# Altium PCB F407.PcbDoc (part 3 of 12)
Units mil, origin at the board's own origin, x right, y up, seen from the top; angles counter-clockwise.
Board outline 6062.25 x 4305.79 mil, 2 copper layers (Top Layer, Bottom Layer); 68 components, 138 nets, 423 pads, 108 vias.
Unrouted connection lines stored in the file: 2.
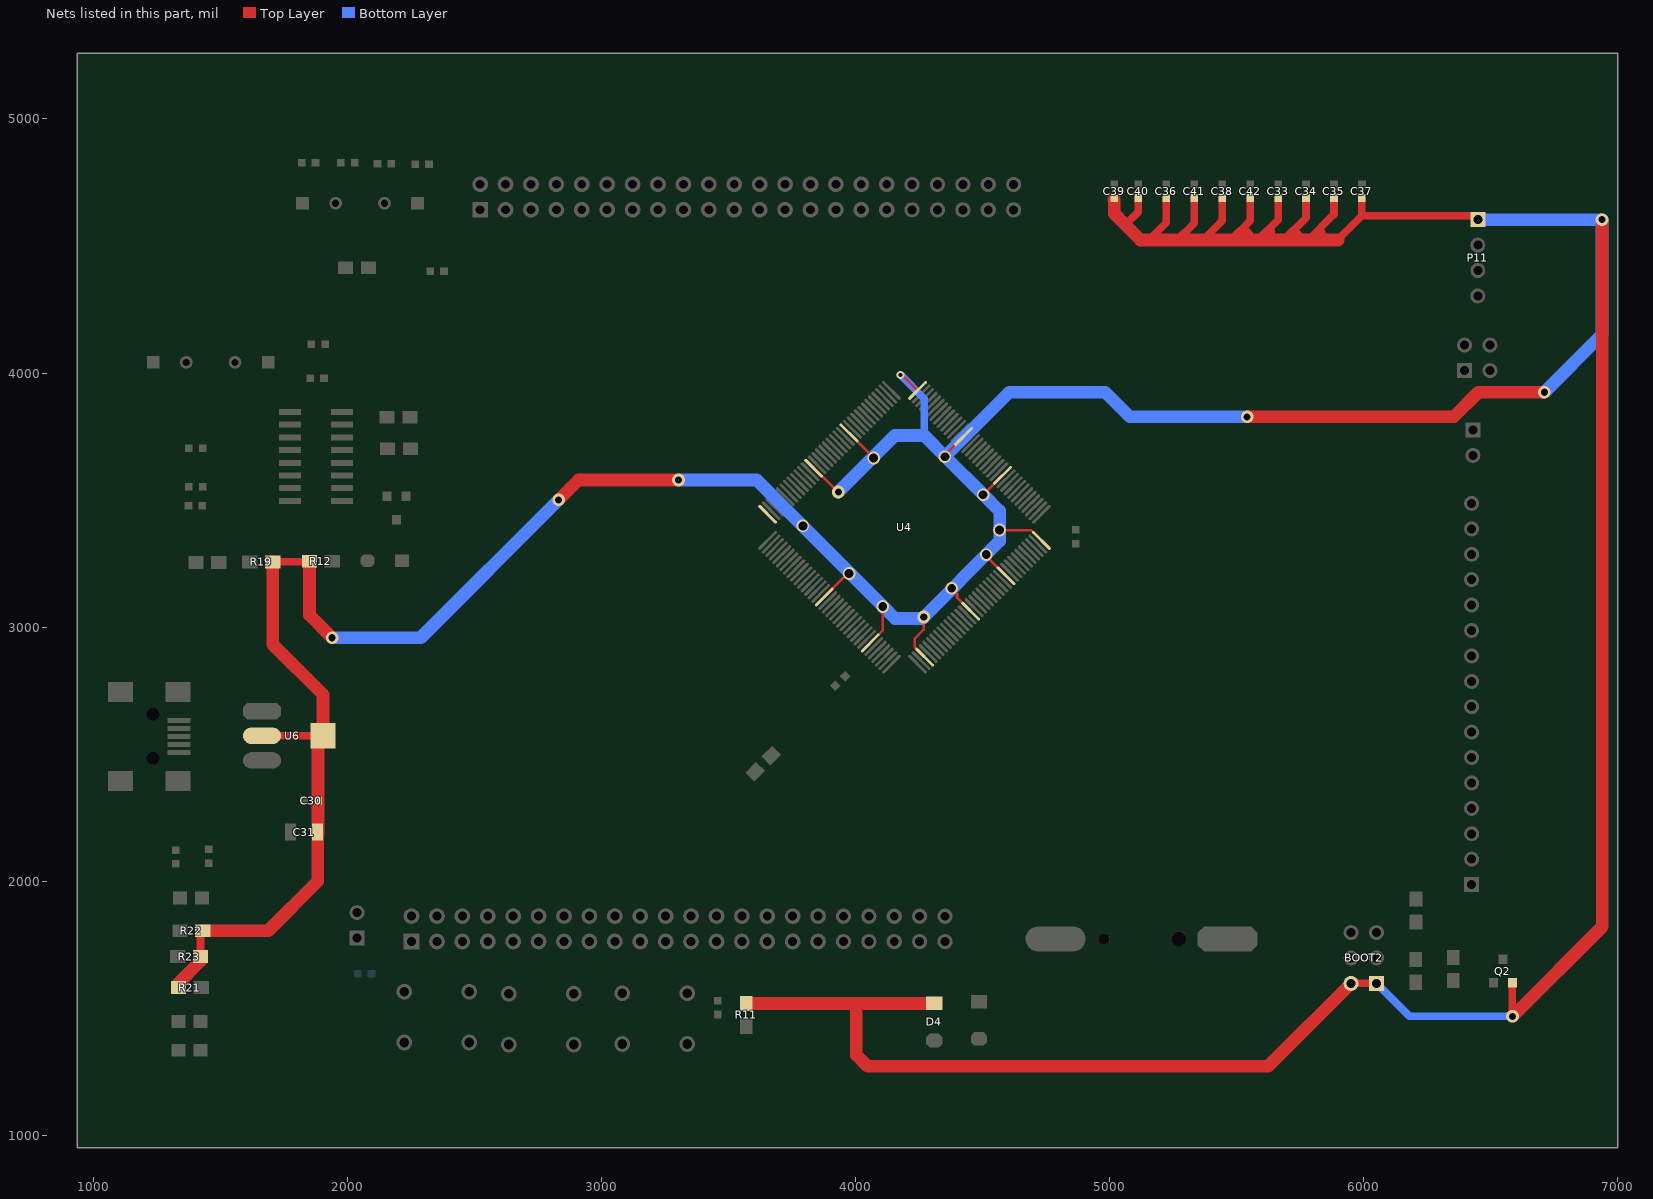
[diagram p3: the nets of this part, all layers, seen from the top]

## Via types
v1: diameter 30, hole 15, Top Layer to Bottom Layer, 48 vias
v2: diameter 50, hole 28, Top Layer to Bottom Layer, 42 vias
v3: diameter 50, hole 35, Top Layer to Bottom Layer, 9 vias
v4: diameter 20, hole 10, Top Layer to Bottom Layer, 8 vias
v5: diameter 50, hole 30, Top Layer to Bottom Layer, 1 vias

## Nets (pads, with @x,y where several pads share a name; then routed paths per layer and width w, separated by ;. In a path a pad name is that pad's centre, name@x,y a point inside that pad or via, vN(x,y) a via of type N, cw(c..) or ccw(c..) an arc to the next point about the centre after c; other vN are vias at no path point) (continued)
VCC3.3: (continued)
  Top Layer w30: R21.2@1335.52,1582.01 R21.2@1335.52,1598.92 ; R23.2@1422.69,1686.09 R23.2@1422.69,1703.85 1422.68,1796.53 R22.2@1431.64,1805.48 ; U6.2@1664.57,2572.63 U6.4@1904.57,2572.63 U6.4@1884.88,2552.94 ; R19.2@1706.82,3256.97 1848.88,3256.97 R12.2@1851.15,3259.25 ; D4.1@4309.56,1519.35 D4.1@4309.74,1519.53 ; 5062.44,4583.22 5113.19,4633.97 C40.2@5113.19,4689.08 ; 5156.2,4524.18 5223.19,4591.17 C36.2@5223.19,4689.08 ; 5266.85,4524.18 5333.19,4590.51 C41.2@5333.19,4689.08 ; 5368.43,4524.18 5443.19,4598.94 C38.2@5443.19,4689.08 ; 5477.43,4524.18 5553.19,4599.94 C42.2@5553.19,4689.08 ; 5520.84,4564.29 cw(c5520.84,4532.9) 5552.23,4532.9 ; 5583.13,4524.18 5663.19,4604.24 C33.2@5663.19,4689.08 ; 5629.91,4536.33 ccw(c5615.97,4551.84) 5631.48,4565.78 ; 5686.35,4524.18 5773.19,4611.01 C34.2@5773.19,4689.08 ; 5724.26,4561.16 cw(c5696.51,4511.98) 5749.38,4531.8 ; 5784.35,4525.41 5883.19,4624.25 C35.2@5883.19,4689.08 ; 5827.29,4564.09 cw(c5816.12,4548.16) 5832.05,4536.99 ; 5898.84,4524.18 5993.19,4618.53 ; BOOT2.2@5950.52,1598.29 BOOT2.1@6050.52,1598.29 ; C37.2@5993.19,4689.08 5993.19,4618.53 ; P11.1@6449.03,4603.71 6434.21,4618.53 5993.19,4618.53 ; Q2.1@6584.85,1600.75 6584.85,1469.67 v2(6586.09,1468.43) ; 5524.47,4551.79 cw(c5502.27,4529.59) 5533.19,4524.18 ; 5524.47,4551.79 cw(c5502.27,4529.59) 5533.19,4524.18 ; 5524.47,4551.79 cw(c5502.27,4529.59) 5533.19,4524.18 ; 5524.47,4551.79 cw(c5502.27,4529.59) 5533.19,4524.18 ; 5524.47,4551.79 cw(c5502.27,4529.59) 5533.19,4524.18 ; 5524.47,4551.79 cw(c5502.27,4529.59) 5533.19,4524.18 ; 5524.47,4551.79 cw(c5502.27,4529.59) 5533.19,4524.18 ; 5524.47,4551.79 cw(c5502.27,4529.59) 5533.19,4524.18 ; 5524.47,4551.79 cw(c5502.27,4529.59) 5533.19,4524.18 ; 5524.47,4551.79 cw(c5502.27,4529.59) 5533.19,4524.18 ; 5524.47,4551.79 cw(c5502.27,4529.59) 5533.19,4524.18 ; 5524.47,4551.79 cw(c5502.27,4529.59) 5533.19,4524.18 ; 5524.47,4551.79 cw(c5502.27,4529.59) 5533.19,4524.18 ; 5524.47,4551.79 cw(c5502.27,4529.59) 5533.19,4524.18 ; 5524.47,4551.79 cw(c5502.27,4529.59) 5533.19,4524.18 ; 5524.47,4551.79 cw(c5502.27,4529.59) 5533.19,4524.18 ; 5524.47,4551.79 cw(c5502.27,4529.59) 5533.19,4524.18 ; 5524.47,4551.79 cw(c5502.27,4529.59) 5533.19,4524.18 ; 5524.47,4551.79 cw(c5502.27,4529.59) 5533.19,4524.18 ; 5524.47,4551.79 cw(c5502.27,4529.59) 5533.19,4524.18 ; 5524.47,4551.79 cw(c5502.27,4529.59) 5533.19,4524.18 ; 5524.47,4551.79 cw(c5502.27,4529.59) 5533.19,4524.18 ; 5524.47,4551.79 cw(c5502.27,4529.59) 5533.19,4524.18 ; 5524.47,4551.79 cw(c5502.27,4529.59) 5533.19,4524.18 ; 5524.47,4551.79 cw(c5502.27,4529.59) 5533.19,4524.18 ; 5524.47,4551.79 cw(c5502.27,4529.59) 5533.19,4524.18 ; 5524.47,4551.79 cw(c5502.27,4529.59) 5533.19,4524.18 ; 5524.47,4551.79 cw(c5502.27,4529.59) 5533.19,4524.18 ; 5524.47,4551.79 cw(c5502.27,4529.59) 5533.19,4524.18 ; 5524.47,4551.79 cw(c5502.27,4529.59) 5533.19,4524.18 ; 5524.47,4551.79 cw(c5502.27,4529.59) 5533.19,4524.18 ; 5524.47,4551.79 cw(c5502.27,4529.59) 5533.19,4524.18 ; 5524.47,4551.79 cw(c5502.27,4529.59) 5533.19,4524.18 ; 5524.47,4551.79 cw(c5502.27,4529.59) 5533.19,4524.18 ; 5524.47,4551.79 cw(c5502.27,4529.59) 5533.19,4524.18 ; 5524.47,4551.79 cw(c5502.27,4529.59) 5533.19,4524.18 ; 5524.47,4551.79 cw(c5502.27,4529.59) 5533.19,4524.18 ; 5524.47,4551.79 cw(c5502.27,4529.59) 5533.19,4524.18 ; 5524.47,4551.79 cw(c5502.27,4529.59) 5533.19,4524.18 ; 5524.47,4551.79 cw(c5502.27,4529.59) 5533.19,4524.18 ; 5524.47,4551.79 cw(c5502.27,4529.59) 5533.19,4524.18 ; 5524.47,4551.79 cw(c5502.27,4529.59) 5533.19,4524.18 ; 5524.47,4551.79 cw(c5502.27,4529.59) 5533.19,4524.18 ; 5524.47,4551.79 cw(c5502.27,4529.59) 5533.19,4524.18 ; 5524.47,4551.79 cw(c5502.27,4529.59) 5533.19,4524.18 ; 5524.47,4551.79 cw(c5502.27,4529.59) 5533.19,4524.18 ; 5524.47,4551.79 cw(c5502.27,4529.59) 5533.19,4524.18 ; 5524.47,4551.79 cw(c5502.27,4529.59) 5533.19,4524.18 ; 5524.47,4551.79 cw(c5502.27,4529.59) 5533.19,4524.18 ; 5524.47,4551.79 cw(c5502.27,4529.59) 5533.19,4524.18 ; 5524.47,4551.79 cw(c5502.27,4529.59) 5533.19,4524.18 ; 5524.47,4551.79 cw(c5502.27,4529.59) 5533.19,4524.18 ; 5524.47,4551.79 cw(c5502.27,4529.59) 5533.19,4524.18 ; 5524.47,4551.79 cw(c5502.27,4529.59) 5533.19,4524.18 ; 5524.47,4551.79 cw(c5502.27,4529.59) 5533.19,4524.18 ; 5524.47,4551.79 cw(c5502.27,4529.59) 5533.19,4524.18 ; 5524.47,4551.79 cw(c5502.27,4529.59) 5533.19,4524.18 ; 5524.47,4551.79 cw(c5502.27,4529.59) 5533.19,4524.18 ; 5524.47,4551.79 cw(c5502.27,4529.59) 5533.19,4524.18 ; 5524.47,4551.79 cw(c5502.27,4529.59) 5533.19,4524.18 ; 5524.47,4551.79 cw(c5502.27,4529.59) 5533.19,4524.18 ; 5524.47,4551.79 cw(c5502.27,4529.59) 5533.19,4524.18 ; 5524.47,4551.79 cw(c5502.27,4529.59) 5533.19,4524.18 ; 5524.47,4551.79 cw(c5502.27,4529.59) 5533.19,4524.18 ; 5524.47,4551.79 cw(c5502.27,4529.59) 5533.19,4524.18 ; 5524.47,4551.79 cw(c5502.27,4529.59) 5533.19,4524.18 ; 5524.47,4551.79 cw(c5502.27,4529.59) 5533.19,4524.18 ; 5524.47,4551.79 cw(c5502.27,4529.59) 5533.19,4524.18 ; 5524.47,4551.79 cw(c5502.27,4529.59) 5533.19,4524.18 ; 5524.47,4551.79 cw(c5502.27,4529.59) 5533.19,4524.18 ; 5524.47,4551.79 cw(c5502.27,4529.59) 5533.19,4524.18 ; 5524.47,4551.79 cw(c5502.27,4529.59) 5533.19,4524.18 ; 5524.47,4551.79 cw(c5502.27,4529.59) 5533.19,4524.18 ; 5524.47,4551.79 cw(c5502.27,4529.59) 5533.19,4524.18 ; 5524.47,4551.79 cw(c5502.27,4529.59) 5533.19,4524.18 ; 5524.47,4551.79 cw(c5502.27,4529.59) 5533.19,4524.18 ; 5524.47,4551.79 cw(c5502.27,4529.59) 5533.19,4524.18 ; 5524.47,4551.79 cw(c5502.27,4529.59) 5533.19,4524.18 ; 5524.47,4551.79 cw(c5502.27,4529.59) 5533.19,4524.18 ; 5524.47,4551.79 cw(c5502.27,4529.59) 5533.19,4524.18 ; 5524.47,4551.79 cw(c5502.27,4529.59) 5533.19,4524.18 ; 5524.47,4551.79 cw(c5502.27,4529.59) 5533.19,4524.18 ; 5524.47,4551.79 cw(c5502.27,4529.59) 5533.19,4524.18 ; 5524.47,4551.79 cw(c5502.27,4529.59) 5533.19,4524.18 ; 5524.47,4551.79 cw(c5502.27,4529.59) 5533.19,4524.18 ; 5524.47,4551.79 cw(c5502.27,4529.59) 5533.19,4524.18 ; 5524.47,4551.79 cw(c5502.27,4529.59) 5533.19,4524.18 ; 5524.47,4551.79 cw(c5502.27,4529.59) 5533.19,4524.18 ; 5524.47,4551.79 cw(c5502.27,4529.59) 5533.19,4524.18 ; 5524.47,4551.79 cw(c5502.27,4529.59) 5533.19,4524.18 ; 5524.47,4551.79 cw(c5502.27,4529.59) 5533.19,4524.18 ; 5524.47,4551.79 cw(c5502.27,4529.59) 5533.19,4524.18 ; 5524.47,4551.79 cw(c5502.27,4529.59) 5533.19,4524.18 ; 5524.47,4551.79 cw(c5502.27,4529.59) 5533.19,4524.18 ; 5524.47,4551.79 cw(c5502.27,4529.59) 5533.19,4524.18 ; 5524.47,4551.79 cw(c5502.27,4529.59) 5533.19,4524.18 ; 5524.47,4551.79 cw(c5502.27,4529.59) 5533.19,4524.18 ; 5524.47,4551.79 cw(c5502.27,4529.59) 5533.19,4524.18 ; 5524.47,4551.79 cw(c5502.27,4529.59) 5533.19,4524.18 ; 5524.47,4551.79 cw(c5502.27,4529.59) 5533.19,4524.18 ; 5524.47,4551.79 cw(c5502.27,4529.59) 5533.19,4524.18 ; 5524.47,4551.79 cw(c5502.27,4529.59) 5533.19,4524.18 ; 5524.47,4551.79 cw(c5502.27,4529.59) 5533.19,4524.18 ; 5524.47,4551.79 cw(c5502.27,4529.59) 5533.19,4524.18 ; 5524.47,4551.79 cw(c5502.27,4529.59) 5533.19,4524.18 ; 5524.47,4551.79 cw(c5502.27,4529.59) 5533.19,4524.18 ; 5524.47,4551.79 cw(c5502.27,4529.59) 5533.19,4524.18 ; 5524.47,4551.79 cw(c5502.27,4529.59) 5533.19,4524.18 ; 5524.47,4551.79 cw(c5502.27,4529.59) 5533.19,4524.18 ; 5524.47,4551.79 cw(c5502.27,4529.59) 5533.19,4524.18 ; 5524.47,4551.79 cw(c5502.27,4529.59) 5533.19,4524.18 ; 5524.47,4551.79 cw(c5502.27,4529.59) 5533.19,4524.18 ; 5524.47,4551.79 cw(c5502.27,4529.59) 5533.19,4524.18 ; 5524.47,4551.79 cw(c5502.27,4529.59) 5533.19,4524.18 ; 5524.47,4551.79 cw(c5502.27,4529.59) 5533.19,4524.18 ; 5524.47,4551.79 cw(c5502.27,4529.59) 5533.19,4524.18 ; 5524.47,4551.79 cw(c5502.27,4529.59) 5533.19,4524.18 ; 5524.47,4551.79 cw(c5502.27,4529.59) 5533.19,4524.18 ; 5524.47,4551.79 cw(c5502.27,4529.59) 5533.19,4524.18 ; 5524.47,4551.79 cw(c5502.27,4529.59) 5533.19,4524.18 ; 5524.47,4551.79 cw(c5502.27,4529.59) 5533.19,4524.18 ; 5524.47,4551.79 cw(c5502.27,4529.59) 5533.19,4524.18 ; 5524.47,4551.79 cw(c5502.27,4529.59) 5533.19,4524.18 ; 5524.47,4551.79 cw(c5502.27,4529.59) 5533.19,4524.18 ; 5524.47,4551.79 cw(c5502.27,4529.59) 5533.19,4524.18 ; 5524.47,4551.79 cw(c5502.27,4529.59) 5533.19,4524.18 ; 5524.47,4551.79 cw(c5502.27,4529.59) 5533.19,4524.18 ; 5524.47,4551.79 cw(c5502.27,4529.59) 5533.19,4524.18 ; 5524.47,4551.79 cw(c5502.27,4529.59) 5533.19,4524.18 ; 5524.47,4551.79 cw(c5502.27,4529.59) 5533.19,4524.18 ; 5524.47,4551.79 cw(c5502.27,4529.59) 5533.19,4524.18 ; 5524.47,4551.79 cw(c5502.27,4529.59) 5533.19,4524.18 ; 5524.47,4551.79 cw(c5502.27,4529.59) 5533.19,4524.18 ; 5524.47,4551.79 cw(c5502.27,4529.59) 5533.19,4524.18 ; 5524.47,4551.79 cw(c5502.27,4529.59) 5533.19,4524.18 ; 5524.47,4551.79 cw(c5502.27,4529.59) 5533.19,4524.18 ; 5524.47,4551.79 cw(c5502.27,4529.59) 5533.19,4524.18 ; 5524.47,4551.79 cw(c5502.27,4529.59) 5533.19,4524.18 ; 5524.47,4551.79 cw(c5502.27,4529.59) 5533.19,4524.18 ; 5524.47,4551.79 cw(c5502.27,4529.59) 5533.19,4524.18 ; 5524.47,4551.79 cw(c5502.27,4529.59) 5533.19,4524.18 ; 5524.47,4551.79 cw(c5502.27,4529.59) 5533.19,4524.18 ; 5524.47,4551.79 cw(c5502.27,4529.59) 5533.19,4524.18 ; 5524.47,4551.79 cw(c5502.27,4529.59) 5533.19,4524.18 ; 5524.47,4551.79 cw(c5502.27,4529.59) 5533.19,4524.18 ; 5524.47,4551.79 cw(c5502.27,4529.59) 5533.19,4524.18 ; 5524.47,4551.79 cw(c5502.27,4529.59) 5533.19,4524.18 ; 5524.47,4551.79 cw(c5502.27,4529.59) 5533.19,4524.18 ; 5524.47,4551.79 cw(c5502.27,4529.59) 5533.19,4524.18 ; 5524.47,4551.79 cw(c5502.27,4529.59) 5533.19,4524.18 ; 5524.47,4551.79 cw(c5502.27,4529.59) 5533.19,4524.18 ; 5524.47,4551.79 cw(c5502.27,4529.59) 5533.19,4524.18 ; 5524.47,4551.79 cw(c5502.27,4529.59) 5533.19,4524.18 ; 5524.47,4551.79 cw(c5502.27,4529.59) 5533.19,4524.18 ; 5524.47,4551.79 cw(c5502.27,4529.59) 5533.19,4524.18 ; 5524.47,4551.79 cw(c5502.27,4529.59) 5533.19,4524.18 ; 5524.47,4551.79 cw(c5502.27,4529.59) 5533.19,4524.18 ; 5524.47,4551.79 cw(c5502.27,4529.59) 5533.19,4524.18 ; 5524.47,4551.79 cw(c5502.27,4529.59) 5533.19,4524.18 ; 5524.47,4551.79 cw(c5502.27,4529.59) 5533.19,4524.18 ; 5524.47,4551.79 cw(c5502.27,4529.59) 5533.19,4524.18 ; 5524.47,4551.79 cw(c5502.27,4529.59) 5533.19,4524.18 ; 5524.47,4551.79 cw(c5502.27,4529.59) 5533.19,4524.18 ; 5524.47,4551.79 cw(c5502.27,4529.59) 5533.19,4524.18 ; 5524.47,4551.79 cw(c5502.27,4529.59) 5533.19,4524.18 ; 5524.47,4551.79 cw(c5502.27,4529.59) 5533.19,4524.18 ; 5524.47,4551.79 cw(c5502.27,4529.59) 5533.19,4524.18 ; 5524.47,4551.79 cw(c5502.27,4529.59) 5533.19,4524.18 ; 5524.47,4551.79 cw(c5502.27,4529.59) 5533.19,4524.18 ; 5524.47,4551.79 cw(c5502.27,4529.59) 5533.19,4524.18 ; 5524.47,4551.79 cw(c5502.27,4529.59) 5533.19,4524.18 ; 5524.47,4551.79 cw(c5502.27,4529.59) 5533.19,4524.18 ; 5524.47,4551.79 cw(c5502.27,4529.59) 5533.19,4524.18 ; 5524.47,4551.79 cw(c5502.27,4529.59) 5533.19,4524.18 ; 5524.47,4551.79 cw(c5502.27,4529.59) 5533.19,4524.18 ; 5524.47,4551.79 cw(c5502.27,4529.59) 5533.19,4524.18 ; 5524.47,4551.79 cw(c5502.27,4529.59) 5533.19,4524.18 ; 5524.47,4551.79 cw(c5502.27,4529.59) 5533.19,4524.18 ; 5524.47,4551.79 cw(c5502.27,4529.59) 5533.19,4524.18 ; 5524.47,4551.79 cw(c5502.27,4529.59) 5533.19,4524.18 ; 5524.47,4551.79 cw(c5502.27,4529.59) 5533.19,4524.18 ; 5524.47,4551.79 cw(c5502.27,4529.59) 5533.19,4524.18 ; 5524.47,4551.79 cw(c5502.27,4529.59) 5533.19,4524.18 ; 5524.47,4551.79 cw(c5502.27,4529.59) 5533.19,4524.18 ; 5524.47,4551.79 cw(c5502.27,4529.59) 5533.19,4524.18 ; 5524.47,4551.79 cw(c5502.27,4529.59) 5533.19,4524.18 ; 5524.47,4551.79 cw(c5502.27,4529.59) 5533.19,4524.18 ; 5524.47,4551.79 cw(c5502.27,4529.59) 5533.19,4524.18 ; 5524.47,4551.79 cw(c5502.27,4529.59) 5533.19,4524.18 ; 5524.47,4551.79 cw(c5502.27,4529.59) 5533.19,4524.18 ; 5524.47,4551.79 cw(c5502.27,4529.59) 5533.19,4524.18 ; 5524.47,4551.79 cw(c5502.27,4529.59) 5533.19,4524.18 ; 5524.47,4551.79 cw(c5502.27,4529.59) 5533.19,4524.18 ; 5524.47,4551.79 cw(c5502.27,4529.59) 5533.19,4524.18 ; 5524.47,4551.79 cw(c5502.27,4529.59) 5533.19,4524.18 ; 5524.47,4551.79 cw(c5502.27,4529.59) 5533.19,4524.18 ; 5524.47,4551.79 cw(c5502.27,4529.59) 5533.19,4524.18 ; 5524.47,4551.79 cw(c5502.27,4529.59) 5533.19,4524.18 ; 5524.47,4551.79 cw(c5502.27,4529.59) 5533.19,4524.18 ; 5524.47,4551.79 cw(c5502.27,4529.59) 5533.19,4524.18 ; 5524.47,4551.79 cw(c5502.27,4529.59) 5533.19,4524.18 ; 5524.47,4551.79 cw(c5502.27,4529.59) 5533.19,4524.18 ; 5524.47,4551.79 cw(c5502.27,4529.59) 5533.19,4524.18 ; 5524.47,4551.79 cw(c5502.27,4529.59) 5533.19,4524.18 ; 5524.47,4551.79 cw(c5502.27,4529.59) 5533.19,4524.18 ; 5524.47,4551.79 cw(c5502.27,4529.59) 5533.19,4524.18 ; 5524.47,4551.79 cw(c5502.27,4529.59) 5533.19,4524.18 ; 5524.47,4551.79 cw(c5502.27,4529.59) 5533.19,4524.18 ; 5524.47,4551.79 cw(c5502.27,4529.59) 5533.19,4524.18 ; 5524.47,4551.79 cw(c5502.27,4529.59) 5533.19,4524.18 ; 5524.47,4551.79 cw(c5502.27,4529.59) 5533.19,4524.18 ; 5524.47,4551.79 cw(c5502.27,4529.59) 5533.19,4524.18 ; 5524.47,4551.79 cw(c5502.27,4529.59) 5533.19,4524.18 ; 5524.47,4551.79 cw(c5502.27,4529.59) 5533.19,4524.18 ; 5524.47,4551.79 cw(c5502.27,4529.59) 5533.19,4524.18 ; 5524.47,4551.79 cw(c5502.27,4529.59) 5533.19,4524.18 ; 5524.47,4551.79 cw(c5502.27,4529.59) 5533.19,4524.18 ; 5524.47,4551.79 cw(c5502.27,4529.59) 5533.19,4524.18 ; 5524.47,4551.79 cw(c5502.27,4529.59) 5533.19,4524.18 ; 5524.47,4551.79 cw(c5502.27,4529.59) 5533.19,4524.18 ; 5524.47,4551.79 cw(c5502.27,4529.59) 5533.19,4524.18 ; 5524.47,4551.79 cw(c5502.27,4529.59) 5533.19,4524.18 ; 5524.47,4551.79 cw(c5502.27,4529.59) 5533.19,4524.18 ; 5524.47,4551.79 cw(c5502.27,4529.59) 5533.19,4524.18 ; 5524.47,4551.79 cw(c5502.27,4529.59) 5533.19,4524.18 ; 5524.47,4551.79 cw(c5502.27,4529.59) 5533.19,4524.18 ; 5524.47,4551.79 cw(c5502.27,4529.59) 5533.19,4524.18 ; 5524.47,4551.79 cw(c5502.27,4529.59) 5533.19,4524.18 ; 5524.47,4551.79 cw(c5502.27,4529.59) 5533.19,4524.18 ; 5524.47,4551.79 cw(c5502.27,4529.59) 5533.19,4524.18 ; 5524.47,4551.79 cw(c5502.27,4529.59) 5533.19,4524.18 ; 5524.47,4551.79 cw(c5502.27,4529.59) 5533.19,4524.18 ; 5524.47,4551.79 cw(c5502.27,4529.59) 5533.19,4524.18 ; 5524.47,4551.79 cw(c5502.27,4529.59) 5533.19,4524.18 ; 5524.47,4551.79 cw(c5502.27,4529.59) 5533.19,4524.18 ; 5524.47,4551.79 cw(c5502.27,4529.59) 5533.19,4524.18 ; 5524.47,4551.79 cw(c5502.27,4529.59) 5533.19,4524.18 ; 5524.47,4551.79 cw(c5502.27,4529.59) 5533.19,4524.18 ; 5524.47,4551.79 cw(c5502.27,4529.59) 5533.19,4524.18 ; 5524.47,4551.79 cw(c5502.27,4529.59) 5533.19,4524.18 ; 5524.47,4551.79 cw(c5502.27,4529.59) 5533.19,4524.18 ; 5524.47,4551.79 cw(c5502.27,4529.59) 5533.19,4524.18 ; 5524.47,4551.79 cw(c5502.27,4529.59) 5533.19,4524.18 ; 5524.47,4551.79 cw(c5502.27,4529.59) 5533.19,4524.18 ; 5524.47,4551.79 cw(c5502.27,4529.59) 5533.19,4524.18 ; 5524.47,4551.79 cw(c5502.27,4529.59) 5533.19,4524.18 ; 5524.47,4551.79 cw(c5502.27,4529.59) 5533.19,4524.18 ; 5524.47,4551.79 cw(c5502.27,4529.59) 5533.19,4524.18 ; 5524.47,4551.79 cw(c5502.27,4529.59) 5533.19,4524.18 ; 5524.47,4551.79 cw(c5502.27,4529.59) 5533.19,4524.18 ; 5524.47,4551.79 cw(c5502.27,4529.59) 5533.19,4524.18 ; 5524.47,4551.79 cw(c5502.27,4529.59) 5533.19,4524.18 ; 5524.47,4551.79 cw(c5502.27,4529.59) 5533.19,4524.18 ; 5524.47,4551.79 cw(c5502.27,4529.59) 5533.19,4524.18 ; 5524.47,4551.79 cw(c5502.27,4529.59) 5533.19,4524.18 ; 5524.47,4551.79 cw(c5502.27,4529.59) 5533.19,4524.18 ; 5524.47,4551.79 cw(c5502.27,4529.59) 5533.19,4524.18 ; 5524.47,4551.79 cw(c5502.27,4529.59) 5533.19,4524.18 ; 5524.47,4551.79 cw(c5502.27,4529.59) 5533.19,4524.18 ; 5524.47,4551.79 cw(c5502.27,4529.59) 5533.19,4524.18 ; 5524.47,4551.79 cw(c5502.27,4529.59) 5533.19,4524.18 ; 5524.47,4551.79 cw(c5502.27,4529.59) 5533.19,4524.18 ; 5524.47,4551.79 cw(c5502.27,4529.59) 5533.19,4524.18 ; 5524.47,4551.79 cw(c5502.27,4529.59) 5533.19,4524.18 ; 5524.47,4551.79 cw(c5502.27,4529.59) 5533.19,4524.18 ; 5524.47,4551.79 cw(c5502.27,4529.59) 5533.19,4524.18 ; 5524.47,4551.79 cw(c5502.27,4529.59) 5533.19,4524.18 ; 5524.47,4551.79 cw(c5502.27,4529.59) 5533.19,4524.18 ; 5524.47,4551.79 cw(c5502.27,4529.59) 5533.19,4524.18 ; 5524.47,4551.79 cw(c5502.27,4529.59) 5533.19,4524.18 ; 5524.47,4551.79 cw(c5502.27,4529.59) 5533.19,4524.18 ; 5524.47,4551.79 cw(c5502.27,4529.59) 5533.19,4524.18 ; 5524.47,4551.79 cw(c5502.27,4529.59) 5533.19,4524.18 ; 5524.47,4551.79 cw(c5502.27,4529.59) 5533.19,4524.18 ; 5524.47,4551.79 cw(c5502.27,4529.59) 5533.19,4524.18 ; 5524.47,4551.79 cw(c5502.27,4529.59) 5533.19,4524.18 ; 5524.47,4551.79 cw(c5502.27,4529.59) 5533.19,4524.18 ; 5524.47,4551.79 cw(c5502.27,4529.59) 5533.19,4524.18 ; 5524.47,4551.79 cw(c5502.27,4529.59) 5533.19,4524.18 ; 5524.47,4551.79 cw(c5502.27,4529.59) 5533.19,4524.18 ; 5524.47,4551.79 cw(c5502.27,4529.59) 5533.19,4524.18 ; 5524.47,4551.79 cw(c5502.27,4529.59) 5533.19,4524.18 ; 5524.47,4551.79 cw(c5502.27,4529.59) 5533.19,4524.18 ; 5524.47,4551.79 cw(c5502.27,4529.59) 5533.19,4524.18 ; 5524.47,4551.79 cw(c5502.27,4529.59) 5533.19,4524.18 ; 5524.47,4551.79 cw(c5502.27,4529.59) 5533.19,4524.18 ; 5524.47,4551.79 cw(c5502.27,4529.59) 5533.19,4524.18 ; 5524.47,4551.79 cw(c5502.27,4529.59) 5533.19,4524.18 ; 5524.47,4551.79 cw(c5502.27,4529.59) 5533.19,4524.18 ; 5524.47,4551.79 cw(c5502.27,4529.59) 5533.19,4524.18 ; 5524.47,4551.79 cw(c5502.27,4529.59) 5533.19,4524.18 ; 5524.47,4551.79 cw(c5502.27,4529.59) 5533.19,4524.18 ; 5524.47,4551.79 cw(c5502.27,4529.59) 5533.19,4524.18 ; 5524.47,4551.79 cw(c5502.27,4529.59) 5533.19,4524.18 ; 5524.47,4551.79 cw(c5502.27,4529.59) 5533.19,4524.18 ; 5524.47,4551.79 cw(c5502.27,4529.59) 5533.19,4524.18 ; 5524.47,4551.79 cw(c5502.27,4529.59) 5533.19,4524.18 ; 5524.47,4551.79 cw(c5502.27,4529.59) 5533.19,4524.18 ; 5524.47,4551.79 cw(c5502.27,4529.59) 5533.19,4524.18 ; 5524.47,4551.79 cw(c5502.27,4529.59) 5533.19,4524.18 ; 5524.47,4551.79 cw(c5502.27,4529.59) 5533.19,4524.18 ; 5524.47,4551.79 cw(c5502.27,4529.59) 5533.19,4524.18 ; 5524.47,4551.79 cw(c5502.27,4529.59) 5533.19,4524.18 ; 5524.47,4551.79 cw(c5502.27,4529.59) 5533.19,4524.18 ; 5524.47,4551.79 cw(c5502.27,4529.59) 5533.19,4524.18 ; 5524.47,4551.79 cw(c5502.27,4529.59) 5533.19,4524.18 ; 5524.47,4551.79 cw(c5502.27,4529.59) 5533.19,4524.18 ; 5524.47,4551.79 cw(c5502.27,4529.59) 5533.19,4524.18 ; 5524.47,4551.79 cw(c5502.27,4529.59) 5533.19,4524.18 ; 5524.47,4551.79 cw(c5502.27,4529.59) 5533.19,4524.18 ; 5524.47,4551.79 cw(c5502.27,4529.59) 5533.19,4524.18 ; 5524.47,4551.79 cw(c5502.27,4529.59) 5533.19,4524.18 ; 5524.47,4551.79 cw(c5502.27,4529.59) 5533.19,4524.18 ; 5524.47,4551.79 cw(c5502.27,4529.59) 5533.19,4524.18 ; 5524.47,4551.79 cw(c5502.27,4529.59) 5533.19,4524.18 ; 5524.47,4551.79 cw(c5502.27,4529.59) 5533.19,4524.18 ; 5524.47,4551.79 cw(c5502.27,4529.59) 5533.19,4524.18 ; 5524.47,4551.79 cw(c5502.27,4529.59) 5533.19,4524.18 ; 5524.47,4551.79 cw(c5502.27,4529.59) 5533.19,4524.18 ; 5524.47,4551.79 cw(c5502.27,4529.59) 5533.19,4524.18 ; 5524.47,4551.79 cw(c5502.27,4529.59) 5533.19,4524.18 ; 5524.47,4551.79 cw(c5502.27,4529.59) 5533.19,4524.18 ; 5524.47,4551.79 cw(c5502.27,4529.59) 5533.19,4524.18 ; 5524.47,4551.79 cw(c5502.27,4529.59) 5533.19,4524.18 ; 5524.47,4551.79 cw(c5502.27,4529.59) 5533.19,4524.18 ; 5524.47,4551.79 cw(c5502.27,4529.59) 5533.19,4524.18 ; 5524.47,4551.79 cw(c5502.27,4529.59) 5533.19,4524.18 ; 5524.47,4551.79 cw(c5502.27,4529.59) 5533.19,4524.18 ; 5524.47,4551.79 cw(c5502.27,4529.59) 5533.19,4524.18 ; 5524.47,4551.79 cw(c5502.27,4529.59) 5533.19,4524.18 ; 5524.47,4551.79 cw(c5502.27,4529.59) 5533.19,4524.18 ; 5524.47,4551.79 cw(c5502.27,4529.59) 5533.19,4524.18 ; 5524.47,4551.79 cw(c5502.27,4529.59) 5533.19,4524.18 ; 5524.47,4551.79 cw(c5502.27,4529.59) 5533.19,4524.18 ; 5524.47,4551.79 cw(c5502.27,4529.59) 5533.19,4524.18 ; 5524.47,4551.79 cw(c5502.27,4529.59) 5533.19,4524.18 ; 5524.47,4551.79 cw(c5502.27,4529.59) 5533.19,4524.18 ; 5524.47,4551.79 cw(c5502.27,4529.59) 5533.19,4524.18 ; 5524.47,4551.79 cw(c5502.27,4529.59) 5533.19,4524.18 ; 5524.47,4551.79 cw(c5502.27,4529.59) 5533.19,4524.18 ; 5524.47,4551.79 cw(c5502.27,4529.59) 5533.19,4524.18 ; 5524.47,4551.79 cw(c5502.27,4529.59) 5533.19,4524.18 ; 5524.47,4551.79 cw(c5502.27,4529.59) 5533.19,4524.18 ; 5524.47,4551.79 cw(c5502.27,4529.59) 5533.19,4524.18 ; 5524.47,4551.79 cw(c5502.27,4529.59) 5533.19,4524.18 ; 5524.47,4551.79 cw(c5502.27,4529.59) 5533.19,4524.18 ; 5524.47,4551.79 cw(c5502.27,4529.59) 5533.19,4524.18 ; 5524.47,4551.79 cw(c5502.27,4529.59) 5533.19,4524.18 ; 5524.47,4551.79 cw(c5502.27,4529.59) 5533.19,4524.18 ; 5524.47,4551.79 cw(c5502.27,4529.59) 5533.19,4524.18 ; 5524.47,4551.79 cw(c5502.27,4529.59) 5533.19,4524.18 ; 5524.47,4551.79 cw(c5502.27,4529.59) 5533.19,4524.18 ; 5524.47,4551.79 cw(c5502.27,4529.59) 5533.19,4524.18 ; 5524.47,4551.79 cw(c5502.27,4529.59) 5533.19,4524.18 ; 5524.47,4551.79 cw(c5502.27,4529.59) 5533.19,4524.18 ; 5524.47,4551.79 cw(c5502.27,4529.59) 5533.19,4524.18 ; 5524.47,4551.79 cw(c5502.27,4529.59) 5533.19,4524.18 ; 5524.47,4551.79 cw(c5502.27,4529.59) 5533.19,4524.18 ; 5524.47,4551.79 cw(c5502.27,4529.59) 5533.19,4524.18 ; 5524.47,4551.79 cw(c5502.27,4529.59) 5533.19,4524.18 ; 5524.47,4551.79 cw(c5502.27,4529.59) 5533.19,4524.18 ; 5524.47,4551.79 cw(c5502.27,4529.59) 5533.19,4524.18 ; 5524.47,4551.79 cw(c5502.27,4529.59) 5533.19,4524.18 ; 5524.47,4551.79 cw(c5502.27,4529.59) 5533.19,4524.18 ; 5524.47,4551.79 cw(c5502.27,4529.59) 5533.19,4524.18 ; 5524.47,4551.79 cw(c5502.27,4529.59) 5533.19,4524.18 ; 5524.47,4551.79 cw(c5502.27,4529.59) 5533.19,4524.18 ; 5524.47,4551.79 cw(c5502.27,4529.59) 5533.19,4524.18 ; 5524.47,4551.79 cw(c5502.27,4529.59) 5533.19,4524.18 ; 5524.47,4551.79 cw(c5502.27,4529.59) 5533.19,4524.18 ; 5524.47,4551.79 cw(c5502.27,4529.59) 5533.19,4524.18 ; 5524.47,4551.79 cw(c5502.27,4529.59) 5533.19,4524.18 ; 5524.47,4551.79 cw(c5502.27,4529.59) 5533.19,4524.18 ; 5524.47,4551.79 cw(c5502.27,4529.59) 5533.19,4524.18 ; 5524.47,4551.79 cw(c5502.27,4529.59) 5533.19,4524.18 ; 5524.47,4551.79 cw(c5502.27,4529.59) 5533.19,4524.18 ; 5524.47,4551.79 cw(c5502.27,4529.59) 5533.19,4524.18 ; 5524.47,4551.79 cw(c5502.27,4529.59) 5533.19,4524.18 ; 5524.47,4551.79 cw(c5502.27,4529.59) 5533.19,4524.18 ; 5524.47,4551.79 cw(c5502.27,4529.59) 5533.19,4524.18 ; 5524.47,4551.79 cw(c5502.27,4529.59) 5533.19,4524.18 ; 5524.47,4551.79 cw(c5502.27,4529.59) 5533.19,4524.18 ; 5524.47,4551.79 cw(c5502.27,4529.59) 5533.19,4524.18 ; 5524.47,4551.79 cw(c5502.27,4529.59) 5533.19,4524.18 ; 5524.47,4551.79 cw(c5502.27,4529.59) 5533.19,4524.18 ; 5524.47,4551.79 cw(c5502.27,4529.59) 5533.19,4524.18 ; 5524.47,4551.79 cw(c5502.27,4529.59) 5533.19,4524.18 ; 5524.47,4551.79 cw(c5502.27,4529.59) 5533.19,4524.18 ; 5524.47,4551.79 cw(c5502.27,4529.59) 5533.19,4524.18 ; 5524.47,4551.79 cw(c5502.27,4529.59) 5533.19,4524.18 ; 5524.47,4551.79 cw(c5502.27,4529.59) 5533.19,4524.18 ; 5524.47,4551.79 cw(c5502.27,4529.59) 5533.19,4524.18 ; 5524.47,4551.79 cw(c5502.27,4529.59) 5533.19,4524.18 ; 5524.47,4551.79 cw(c5502.27,4529.59) 5533.19,4524.18 ; 5524.47,4551.79 cw(c5502.27,4529.59) 5533.19,4524.18 ; 5524.47,4551.79 cw(c5502.27,4529.59) 5533.19,4524.18 ; 5524.47,4551.79 cw(c5502.27,4529.59) 5533.19,4524.18 ; 5524.47,4551.79 cw(c5502.27,4529.59) 5533.19,4524.18 ; 5524.47,4551.79 cw(c5502.27,4529.59) 5533.19,4524.18 ; 5524.47,4551.79 cw(c5502.27,4529.59) 5533.19,4524.18 ; 5524.47,4551.79 cw(c5502.27,4529.59) 5533.19,4524.18 ; 5524.47,4551.79 cw(c5502.27,4529.59) 5533.19,4524.18 ; 5524.47,4551.79 cw(c5502.27,4529.59) 5533.19,4524.18 ; 5524.47,4551.79 cw(c5502.27,4529.59) 5533.19,4524.18 ; 5524.47,4551.79 cw(c5502.27,4529.59) 5533.19,4524.18 ; 5524.47,4551.79 cw(c5502.27,4529.59) 5533.19,4524.18 ; 5524.47,4551.79 cw(c5502.27,4529.59) 5533.19,4524.18 ; 5524.47,4551.79 cw(c5502.27,4529.59) 5533.19,4524.18 ; 5524.47,4551.79 cw(c5502.27,4529.59) 5533.19,4524.18 ; 5524.47,4551.79 cw(c5502.27,4529.59) 5533.19,4524.18 ; 5524.47,4551.79 cw(c5502.27,4529.59) 5533.19,4524.18 ; 5524.47,4551.79 cw(c5502.27,4529.59) 5533.19,4524.18 ; 5524.47,4551.79 cw(c5502.27,4529.59) 5533.19,4524.18 ; 5524.47,4551.79 cw(c5502.27,4529.59) 5533.19,4524.18 ; 5524.47,4551.79 cw(c5502.27,4529.59) 5533.19,4524.18 ; 5524.47,4551.79 cw(c5502.27,4529.59) 5533.19,4524.18 ; 5524.47,4551.79 cw(c5502.27,4529.59) 5533.19,4524.18 ; 5524.47,4551.79 cw(c5502.27,4529.59) 5533.19,4524.18 ; 5524.47,4551.79 cw(c5502.27,4529.59) 5533.19,4524.18 ; 5524.47,4551.79 cw(c5502.27,4529.59) 5533.19,4524.18 ; 5524.47,4551.79 cw(c5502.27,4529.59) 5533.19,4524.18 ; 5524.47,4551.79 cw(c5502.27,4529.59) 5533.19,4524.18 ; 5524.47,4551.79 cw(c5502.27,4529.59) 5533.19,4524.18 ; 5524.47,4551.79 cw(c5502.27,4529.59) 5533.19,4524.18 ; 5524.47,4551.79 cw(c5502.27,4529.59) 5533.19,4524.18 ; 5524.47,4551.79 cw(c5502.27,4529.59) 5533.19,4524.18 ; 5524.47,4551.79 cw(c5502.27,4529.59) 5533.19,4524.18 ; 5524.47,4551.79 cw(c5502.27,4529.59) 5533.19,4524.18 ; 5524.47,4551.79 cw(c5502.27,4529.59) 5533.19,4524.18 ; 5524.47,4551.79 cw(c5502.27,4529.59) 5533.19,4524.18 ; 5524.47,4551.79 cw(c5502.27,4529.59) 5533.19,4524.18 ; 5524.47,4551.79 cw(c5502.27,4529.59) 5533.19,4524.18 ; 5524.47,4551.79 cw(c5502.27,4529.59) 5533.19,4524.18 ; 5524.47,4551.79 cw(c5502.27,4529.59) 5533.19,4524.18 ; 5524.47,4551.79 cw(c5502.27,4529.59) 5533.19,4524.18 ; 5524.47,4551.79 cw(c5502.27,4529.59) 5533.19,4524.18 ; 5524.47,4551.79 cw(c5502.27,4529.59) 5533.19,4524.18 ; 5524.47,4551.79 cw(c5502.27,4529.59) 5533.19,4524.18 ; 5524.47,4551.79 cw(c5502.27,4529.59) 5533.19,4524.18 ; 5524.47,4551.79 cw(c5502.27,4529.59) 5533.19,4524.18 ; 5524.47,4551.79 cw(c5502.27,4529.59) 5533.19,4524.18 ; 5524.47,4551.79 cw(c5502.27,4529.59) 5533.19,4524.18 ; 5524.47,4551.79 cw(c5502.27,4529.59) 5533.19,4524.18 ; 5524.47,4551.79 cw(c5502.27,4529.59) 5533.19,4524.18 ; 5524.47,4551.79 cw(c5502.27,4529.59) 5533.19,4524.18 ; 5524.47,4551.79 cw(c5502.27,4529.59) 5533.19,4524.18 ; 5524.47,4551.79 cw(c5502.27,4529.59) 5533.19,4524.18 ; 5524.47,4551.79 cw(c5502.27,4529.59) 5533.19,4524.18 ; 5524.47,4551.79 cw(c5502.27,4529.59) 5533.19,4524.18 ; 5524.47,4551.79 cw(c5502.27,4529.59) 5533.19,4524.18 ; 5524.47,4551.79 cw(c5502.27,4529.59) 5533.19,4524.18 ; 5524.47,4551.79 cw(c5502.27,4529.59) 5533.19,4524.18 ; 5524.47,4551.79 cw(c5502.27,4529.59) 5533.19,4524.18 ; 5524.47,4551.79 cw(c5502.27,4529.59) 5533.19,4524.18 ; 5524.47,4551.79 cw(c5502.27,4529.59) 5533.19,4524.18 ; 5524.47,4551.79 cw(c5502.27,4529.59) 5533.19,4524.18 ; 5524.47,4551.79 cw(c5502.27,4529.59) 5533.19,4524.18 ; 5524.47,4551.79 cw(c5502.27,4529.59) 5533.19,4524.18 ; 5524.47,4551.79 cw(c5502.27,4529.59) 5533.19,4524.18 ; 5524.47,4551.79 cw(c5502.27,4529.59) 5533.19,4524.18 ; 5524.47,4551.79 cw(c5502.27,4529.59) 5533.19,4524.18 ; 5524.47,4551.79 cw(c5502.27,4529.59) 5533.19,4524.18 ; 5524.47,4551.79 cw(c5502.27,4529.59) 5533.19,4524.18 ; 5524.47,4551.79 cw(c5502.27,4529.59) 5533.19,4524.18 ; 5524.47,4551.79 cw(c5502.27,4529.59) 5533.19,4524.18 ; 5524.47,4551.79 cw(c5502.27,4529.59) 5533.19,4524.18 ; 5524.47,4551.79 cw(c5502.27,4529.59) 5533.19,4524.18 ; 5524.47,4551.79 cw(c5502.27,4529.59) 5533.19,4524.18 ; 5524.47,4551.79 cw(c5502.27,4529.59) 5533.19,4524.18 ; 5524.47,4551.79 cw(c5502.27,4529.59) 5533.19,4524.18 ; 5524.47,4551.79 cw(c5502.27,4529.59) 5533.19,4524.18 ; 5524.47,4551.79 cw(c5502.27,4529.59) 5533.19,4524.18 ; 5524.47,4551.79 cw(c5502.27,4529.59) 5533.19,4524.18 ; 5524.47,4551.79 cw(c5502.27,4529.59) 5533.19,4524.18 ; 5524.47,4551.79 cw(c5502.27,4529.59) 5533.19,4524.18 ; 5524.47,4551.79 cw(c5502.27,4529.59) 5533.19,4524.18 ; 5524.47,4551.79 cw(c5502.27,4529.59) 5533.19,4524.18 ; 5524.47,4551.79 cw(c5502.27,4529.59) 5533.19,4524.18 ; 5524.47,4551.79 cw(c5502.27,4529.59) 5533.19,4524.18 ; 5524.47,4551.79 cw(c5502.27,4529.59) 5533.19,4524.18 ; 5524.47,4551.79 cw(c5502.27,4529.59) 5533.19,4524.18 ; 5524.47,4551.79 cw(c5502.27,4529.59) 5533.19,4524.18 ; 5524.47,4551.79 cw(c5502.27,4529.59) 5533.19,4524.18 ; 5524.47,4551.79 cw(c5502.27,4529.59) 5533.19,4524.18 ; 5524.47,4551.79 cw(c5502.27,4529.59) 5533.19,4524.18 ; 5524.47,4551.79 cw(c5502.27,4529.59) 5533.19,4524.18 ; 5524.47,4551.79 cw(c5502.27,4529.59) 5533.19,4524.18 ; 5524.47,4551.79 cw(c5502.27,4529.59) 5533.19,4524.18 ; 5524.47,4551.79 cw(c5502.27,4529.59) 5533.19,4524.18 ; 5524.47,4551.79 cw(c5502.27,4529.59) 5533.19,4524.18 ; 5524.47,4551.79 cw(c5502.27,4529.59) 5533.19,4524.18 ; 5524.47,4551.79 cw(c5502.27,4529.59) 5533.19,4524.18 ; 5524.47,4551.79 cw(c5502.27,4529.59) 5533.19,4524.18 ; 5524.47,4551.79 cw(c5502.27,4529.59) 5533.19,4524.18 ; 5524.47,4551.79 cw(c5502.27,4529.59) 5533.19,4524.18 ; 5524.47,4551.79 cw(c5502.27,4529.59) 5533.19,4524.18 ; 5524.47,4551.79 cw(c5502.27,4529.59) 5533.19,4524.18 ; 5524.47,4551.79 cw(c5502.27,4529.59) 5533.19,4524.18 ; 5524.47,4551.79 cw(c5502.27,4529.59) 5533.19,4524.18 ; 5524.47,4551.79 cw(c5502.27,4529.59) 5533.19,4524.18 ; 5524.47,4551.79 cw(c5502.27,4529.59) 5533.19,4524.18 ; 5524.47,4551.79 cw(c5502.27,4529.59) 5533.19,4524.18 ; 5524.47,4551.79 cw(c5502.27,4529.59) 5533.19,4524.18 ; 5524.47,4551.79 cw(c5502.27,4529.59) 5533.19,4524.18 ; 5524.47,4551.79 cw(c5502.27,4529.59) 5533.19,4524.18 ; 5524.47,4551.79 cw(c5502.27,4529.59) 5533.19,4524.18 ; 5524.47,4551.79 cw(c5502.27,4529.59) 5533.19,4524.18 ; 5524.47,4551.79 cw(c5502.27,4529.59) 5533.19,4524.18 ; 5524.47,4551.79 cw(c5502.27,4529.59) 5533.19,4524.18 ; 5524.47,4551.79 cw(c5502.27,4529.59) 5533.19,4524.18 ; 5524.47,4551.79 cw(c5502.27,4529.59) 5533.19,4524.18 ; 5524.47,4551.79 cw(c5502.27,4529.59) 5533.19,4524.18 ; 5524.47,4551.79 cw(c5502.27,4529.59) 5533.19,4524.18 ; 5524.47,4551.79 cw(c5502.27,4529.59) 5533.19,4524.18 ; 5524.47,4551.79 cw(c5502.27,4529.59) 5533.19,4524.18 ; 5524.47,4551.79 cw(c5502.27,4529.59) 5533.19,4524.18 ; 5524.47,4551.79 cw(c5502.27,4529.59) 5533.19,4524.18 ; 5524.47,4551.79 cw(c5502.27,4529.59) 5533.19,4524.18 ; 5524.47,4551.79 cw(c5502.27,4529.59) 5533.19,4524.18 ; 5524.47,4551.79 cw(c5502.27,4529.59) 5533.19,4524.18 ; 5524.47,4551.79 cw(c5502.27,4529.59) 5533.19,4524.18 ; 5524.47,4551.79 cw(c5502.27,4529.59) 5533.19,4524.18 ; 5524.47,4551.79 cw(c5502.27,4529.59) 5533.19,4524.18 ; 5524.47,4551.79 cw(c5502.27,4529.59) 5533.19,4524.18 ; 5524.47,4551.79 cw(c5502.27,4529.59) 5533.19,4524.18 ; 5524.47,4551.79 cw(c5502.27,4529.59) 5533.19,4524.18 ; 5524.47,4551.79 cw(c5502.27,4529.59) 5533.19,4524.18 ; 5524.47,4551.79 cw(c5502.27,4529.59) 5533.19,4524.18 ; 5524.47,4551.79 cw(c5502.27,4529.59) 5533.19,4524.18 ; 5524.47,4551.79 cw(c5502.27,4529.59) 5533.19,4524.18 ; 5524.47,4551.79 cw(c5502.27,4529.59) 5533.19,4524.18 ; 5524.47,4551.79 cw(c5502.27,4529.59) 5533.19,4524.18 ; 5524.47,4551.79 cw(c5502.27,4529.59) 5533.19,4524.18 ; 5524.47,4551.79 cw(c5502.27,4529.59) 5533.19,4524.18 ; 5524.47,4551.79 cw(c5502.27,4529.59) 5533.19,4524.18 ; 5524.47,4551.79 cw(c5502.27,4529.59) 5533.19,4524.18 ; 5524.47,4551.79 cw(c5502.27,4529.59) 5533.19,4524.18 ; 5524.47,4551.79 cw(c5502.27,4529.59) 5533.19,4524.18 ; 5524.47,4551.79 cw(c5502.27,4529.59) 5533.19,4524.18 ; 5524.47,4551.79 cw(c5502.27,4529.59) 5533.19,4524.18 ; 5524.47,4551.79 cw(c5502.27,4529.59) 5533.19,4524.18 ; 5524.47,4551.79 cw(c5502.27,4529.59) 5533.19,4524.18 ; 5524.47,4551.79 cw(c5502.27,4529.59) 5533.19,4524.18 ; 5524.47,4551.79 cw(c5502.27,4529.59) 5533.19,4524.18 ; 5524.47,4551.79 cw(c5502.27,4529.59) 5533.19,4524.18 ; 5524.47,4551.79 cw(c5502.27,4529.59) 5533.19,4524.18 ; 5524.47,4551.79 cw(c5502.27,4529.59) 5533.19,4524.18 ; 5524.47,4551.79 cw(c5502.27,4529.59) 5533.19,4524.18 ; 5524.47,4551.79 cw(c5502.27,4529.59) 5533.19,4524.18 ; 5524.47,4551.79 cw(c5502.27,4529.59) 5533.19,4524.18 ; 5524.47,4551.79 cw(c5502.27,4529.59) 5533.19,4524.18 ; 5524.47,4551.79 cw(c5502.27,4529.59) 5533.19,4524.18 ; 5524.47,4551.79 cw(c5502.27,4529.59) 5533.19,4524.18 ; 5524.47,4551.79 cw(c5502.27,4529.59) 5533.19,4524.18 ; 5524.47,4551.79 cw(c5502.27,4529.59) 5533.19,4524.18 ; 5524.47,4551.79 cw(c5502.27,4529.59) 5533.19,4524.18 ; 5524.47,4551.79 cw(c5502.27,4529.59) 5533.19,4524.18 ; 5524.47,4551.79 cw(c5502.27,4529.59) 5533.19,4524.18 ; 5524.47,4551.79 cw(c5502.27,4529.59) 5533.19,4524.18 ; 5524.47,4551.79 cw(c5502.27,4529.59) 5533.19,4524.18 ; 5524.47,4551.79 cw(c5502.27,4529.59) 5533.19,4524.18 ; 5524.47,4551.79 cw(c5502.27,4529.59) 5533.19,4524.18 ; 5524.47,4551.79 cw(c5502.27,4529.59) 5533.19,4524.18 ; 5524.47,4551.79 cw(c5502.27,4529.59) 5533.19,4524.18 ; 5524.47,4551.79 cw(c5502.27,4529.59) 5533.19,4524.18 ; 5524.47,4551.79 cw(c5502.27,4529.59) 5533.19,4524.18 ; 5524.47,4551.79 cw(c5502.27,4529.59) 5533.19,4524.18 ; 5524.47,4551.79 cw(c5502.27,4529.59) 5533.19,4524.18 ; 5524.47,4551.79 cw(c5502.27,4529.59) 5533.19,4524.18 ; 5524.47,4551.79 cw(c5502.27,4529.59) 5533.19,4524.18 ; 5524.47,4551.79 cw(c5502.27,4529.59) 5533.19,4524.18 ; 5524.47,4551.79 cw(c5502.27,4529.59) 5533.19,4524.18 ; 5524.47,4551.79 cw(c5502.27,4529.59) 5533.19,4524.18 ; 5524.47,4551.79 cw(c5502.27,4529.59) 5533.19,4524.18 ; 5524.47,4551.79 cw(c5502.27,4529.59) 5533.19,4524.18 ; 5524.47,4551.79 cw(c5502.27,4529.59) 5533.19,4524.18 ; 5524.47,4551.79 cw(c5502.27,4529.59) 5533.19,4524.18 ; 5524.47,4551.79 cw(c5502.27,4529.59) 5533.19,4524.18 ; 5524.47,4551.79 cw(c5502.27,4529.59) 5533.19,4524.18 ; 5524.47,4551.79 cw(c5502.27,4529.59) 5533.19,4524.18 ; 5524.47,4551.79 cw(c5502.27,4529.59) 5533.19,4524.18 ; 5524.47,4551.79 cw(c5502.27,4529.59) 5533.19,4524.18 ; 5524.47,4551.79 cw(c5502.27,4529.59) 5533.19,4524.18 ; 5524.47,4551.79 cw(c5502.27,4529.59) 5533.19,4524.18 ; 5524.47,4551.79 cw(c5502.27,4529.59) 5533.19,4524.18 ; 5524.47,4551.79 cw(c5502.27,4529.59) 5533.19,4524.18 ; 5524.47,4551.79 cw(c5502.27,4529.59) 5533.19,4524.18 ; 5524.47,4551.79 cw(c5502.27,4529.59) 5533.19,4524.18 ; 5524.47,4551.79 cw(c5502.27,4529.59) 5533.19,4524.18 ; 5524.47,4551.79 cw(c5502.27,4529.59) 5533.19,4524.18 ; 5524.47,4551.79 cw(c5502.27,4529.59) 5533.19,4524.18 ; 5524.47,4551.79 cw(c5502.27,4529.59) 5533.19,4524.18 ; 5524.47,4551.79 cw(c5502.27,4529.59) 5533.19,4524.18 ; 5524.47,4551.79 cw(c5502.27,4529.59) 5533.19,4524.18 ; 5524.47,4551.79 cw(c5502.27,4529.59) 5533.19,4524.18 ; 5524.47,4551.79 cw(c5502.27,4529.59) 5533.19,4524.18 ; 5524.47,4551.79 cw(c5502.27,4529.59) 5533.19,4524.18 ; 5524.47,4551.79 cw(c5502.27,4529.59) 5533.19,4524.18 ; 5524.47,4551.79 cw(c5502.27,4529.59) 5533.19,4524.18 ; 5524.47,4551.79 cw(c5502.27,4529.59) 5533.19,4524.18 ; 5524.47,4551.79 cw(c5502.27,4529.59) 5533.19,4524.18 ; 5524.47,4551.79 cw(c5502.27,4529.59) 5533.19,4524.18 ; 5524.47,4551.79 cw(c5502.27,4529.59) 5533.19,4524.18 ; 5524.47,4551.79 cw(c5502.27,4529.59) 5533.19,4524.18 ; 5524.47,4551.79 cw(c5502.27,4529.59) 5533.19,4524.18 ; 5524.47,4551.79 cw(c5502.27,4529.59) 5533.19,4524.18 ; 5524.47,4551.79 cw(c5502.27,4529.59) 5533.19,4524.18 ; 5524.47,4551.79 cw(c5502.27,4529.59) 5533.19,4524.18 ; 5524.47,4551.79 cw(c5502.27,4529.59) 5533.19,4524.18 ; 5524.47,4551.79 cw(c5502.27,4529.59) 5533.19,4524.18 ; 5524.47,4551.79 cw(c5502.27,4529.59) 5533.19,4524.18 ; 5524.47,4551.79 cw(c5502.27,4529.59) 5533.19,4524.18 ; 5524.47,4551.79 cw(c5502.27,4529.59) 5533.19,4524.18 ; 5524.47,4551.79 cw(c5502.27,4529.59) 5533.19,4524.18 ; 5524.47,4551.79 cw(c5502.27,4529.59) 5533.19,4524.18 ; 5524.47,4551.79 cw(c5502.27,4529.59) 5533.19,4524.18 ; 5524.47,4551.79 cw(c5502.27,4529.59) 5533.19,4524.18 ; 5524.47,4551.79 cw(c5502.27,4529.59) 5533.19,4524.18 ; 5524.47,4551.79 cw(c5502.27,4529.59) 5533.19,4524.18 ; 5524.47,4551.79 cw(c5502.27,4529.59) 5533.19,4524.18 ; 5524.47,4551.79 cw(c5502.27,4529.59) 5533.19,4524.18 ; 5524.47,4551.79 cw(c5502.27,4529.59) 5533.19,4524.18 ; 5524.47,4551.79 cw(c5502.27,4529.59) 5533.19,4524.18 ; 5524.47,4551.79 cw(c5502.27,4529.59) 5533.19,4524.18 ; 5524.47,4551.79 cw(c5502.27,4529.59) 5533.19,4524.18 ; 5524.47,4551.79 cw(c5502.27,4529.59) 5533.19,4524.18 ; 5524.47,4551.79 cw(c5502.27,4529.59) 5533.19,4524.18 ; 5524.47,4551.79 cw(c5502.27,4529.59) 5533.19,4524.18 ; 5524.47,4551.79 cw(c5502.27,4529.59) 5533.19,4524.18 ; 5524.47,4551.79 cw(c5502.27,4529.59) 5533.19,4524.18 ; 5524.47,4551.79 cw(c5502.27,4529.59) 5533.19,4524.18 ; 5524.47,4551.79 cw(c5502.27,4529.59) 5533.19,4524.18 ; 5524.47,4551.79 cw(c5502.27,4529.59) 5533.19,4524.18 ; 5524.47,4551.79 cw(c5502.27,4529.59) 5533.19,4524.18 ; 5524.47,4551.79 cw(c5502.27,4529.59) 5533.19,4524.18 ; 5524.47,4551.79 cw(c5502.27,4529.59) 5533.19,4524.18 ; 5524.47,4551.79 cw(c5502.27,4529.59) 5533.19,4524.18 ; 5524.47,4551.79 cw(c5502.27,4529.59) 5533.19,4524.18 ; 5524.47,4551.79 cw(c5502.27,4529.59) 5533.19,4524.18 ; 5524.47,4551.79 cw(c5502.27,4529.59) 5533.19,4524.18 ; 5524.47,4551.79 cw(c5502.27,4529.59) 5533.19,4524.18 ; 5524.47,4551.79 cw(c5502.27,4529.59) 5533.19,4524.18 ; 5524.47,4551.79 cw(c5502.27,4529.59) 5533.19,4524.18 ; 5524.47,4551.79 cw(c5502.27,4529.59) 5533.19,4524.18 ; 5524.47,4551.79 cw(c5502.27,4529.59) 5533.19,4524.18 ; 5524.47,4551.79 cw(c5502.27,4529.59) 5533.19,4524.18 ; 5524.47,4551.79 cw(c5502.27,4529.59) 5533.19,4524.18 ; 5524.47,4551.79 cw(c5502.27,4529.59) 5533.19,4524.18 ; 5524.47,4551.79 cw(c5502.27,4529.59) 5533.19,4524.18 ; 5524.47,4551.79 cw(c5502.27,4529.59) 5533.19,4524.18 ; 5524.47,4551.79 cw(c5502.27,4529.59) 5533.19,4524.18 ; 5524.47,4551.79 cw(c5502.27,4529.59) 5533.19,4524.18 ; 5524.47,4551.79 cw(c5502.27,4529.59) 5533.19,4524.18 ; 5524.47,4551.79 cw(c5502.27,4529.59) 5533.19,4524.18 ; 5524.47,4551.79 cw(c5502.27,4529.59) 5533.19,4524.18 ; 5524.47,4551.79 cw(c5502.27,4529.59) 5533.19,4524.18 ; 5524.47,4551.79 cw(c5502.27,4529.59) 5533.19,4524.18 ; 5524.47,4551.79 cw(c5502.27,4529.59) 5533.19,4524.18 ; 5524.47,4551.79 cw(c5502.27,4529.59) 5533.19,4524.18 ; 5524.47,4551.79 cw(c5502.27,4529.59) 5533.19,4524.18 ; 5524.47,4551.79 cw(c5502.27,4529.59) 5533.19,4524.18 ; 5524.47,4551.79 cw(c5502.27,4529.59) 5533.19,4524.18 ; 5524.47,4551.79 cw(c5502.27,4529.59) 5533.19,4524.18 ; 5524.47,4551.79 cw(c5502.27,4529.59) 5533.19,4524.18 ; 5524.47,4551.79 cw(c5502.27,4529.59) 5533.19,4524.18 ; 5524.47,4551.79 cw(c5502.27,4529.59) 5533.19,4524.18 ; 5524.47,4551.79 cw(c5502.27,4529.59) 5533.19,4524.18 ; 5524.47,4551.79 cw(c5502.27,4529.59) 5533.19,4524.18 ; 5524.47,4551.79 cw(c5502.27,4529.59) 5533.19,4524.18 ; 5524.47,4551.79 cw(c5502.27,4529.59) 5533.19,4524.18 ; 5524.47,4551.79 cw(c5502.27,4529.59) 5533.19,4524.18 ; 5524.47,4551.79 cw(c5502.27,4529.59) 5533.19,4524.18 ; 5524.47,4551.79 cw(c5502.27,4529.59) 5533.19,4524.18 ; 5524.47,4551.79 cw(c5502.27,4529.59) 5533.19,4524.18 ; 5524.47,4551.79 cw(c5502.27,4529.59) 5533.19,4524.18 ; 5524.47,4551.79 cw(c5502.27,4529.59) 5533.19,4524.18 ; 5524.47,4551.79 cw(c5502.27,4529.59) 5533.19,4524.18 ; 5524.47,4551.79 cw(c5502.27,4529.59) 5533.19,4524.18 ; 5524.47,4551.79 cw(c5502.27,4529.59) 5533.19,4524.18 ; 5524.47,4551.79 cw(c5502.27,4529.59) 5533.19,4524.18 ; 5524.47,4551.79 cw(c5502.27,4529.59) 5533.19,4524.18 ; 5524.47,4551.79 cw(c5502.27,4529.59) 5533.19,4524.18 ; 5524.47,4551.79 cw(c5502.27,4529.59) 5533.19,4524.18 ; 5524.47,4551.79 cw(c5502.27,4529.59) 5533.19,4524.18 ; 5524.47,4551.79 cw(c5502.27,4529.59) 5533.19,4524.18 ; 5524.47,4551.79 cw(c5502.27,4529.59) 5533.19,4524.18 ; 5524.47,4551.79 cw(c5502.27,4529.59) 5533.19,4524.18 ; 5524.47,4551.79 cw(c5502.27,4529.59) 5533.19,4524.18 ; 5524.47,4551.79 cw(c5502.27,4529.59) 5533.19,4524.18 ; 5524.47,4551.79 cw(c5502.27,4529.59) 5533.19,4524.18 ; 5524.47,4551.79 cw(c5502.27,4529.59) 5533.19,4524.18 ; 5524.47,4551.79 cw(c5502.27,4529.59) 5533.19,4524.18 ; 5524.47,4551.79 cw(c5502.27,4529.59) 5533.19,4524.18 ; 5524.47,4551.79 cw(c5502.27,4529.59) 5533.19,4524.18 ; 5524.47,4551.79 cw(c5502.27,4529.59) 5533.19,4524.18 ; 5524.47,4551.79 cw(c5502.27,4529.59) 5533.19,4524.18 ; 5524.47,4551.79 cw(c5502.27,4529.59) 5533.19,4524.18 ; 5524.47,4551.79 cw(c5502.27,4529.59) 5533.19,4524.18 ; 5524.47,4551.79 cw(c5502.27,4529.59) 5533.19,4524.18 ; 5524.47,4551.79 cw(c5502.27,4529.59) 5533.19,4524.18 ; 5524.47,4551.79 cw(c5502.27,4529.59) 5533.19,4524.18 ; 5524.47,4551.79 cw(c5502.27,4529.59) 5533.19,4524.18 ; 5524.47,4551.79 cw(c5502.27,4529.59) 5533.19,4524.18 ; 5524.47,4551.79 cw(c5502.27,4529.59) 5533.19,4524.18 ; 5524.47,4551.79 cw(c5502.27,4529.59) 5533.19,4524.18 ; 5524.47,4551.79 cw(c5502.27,4529.59) 5533.19,4524.18 ; 5524.47,4551.79 cw(c5502.27,4529.59) 5533.19,4524.18 ; 5524.47,4551.79 cw(c5502.27,4529.59) 5533.19,4524.18 ; 5524.47,4551.79 cw(c5502.27,4529.59) 5533.19,4524.18 ; 5524.47,4551.79 cw(c5502.27,4529.59) 5533.19,4524.18 ; 5524.47,4551.79 cw(c5502.27,4529.59) 5533.19,4524.18 ; 5524.47,4551.79 cw(c5502.27,4529.59) 5533.19,4524.18 ; 5524.47,4551.79 cw(c5502.27,4529.59) 5533.19,4524.18 ; 5524.47,4551.79 cw(c5502.27,4529.59) 5533.19,4524.18 ; 5524.47,4551.79 cw(c5502.27,4529.59) 5533.19,4524.18 ; 5524.47,4551.79 cw(c5502.27,4529.59) 5533.19,4524.18 ; 5524.47,4551.79 cw(c5502.27,4529.59) 5533.19,4524.18 ; 5524.47,4551.79 cw(c5502.27,4529.59) 5533.19,4524.18 ; 5524.47,4551.79 cw(c5502.27,4529.59) 5533.19,4524.18 ; 5524.47,4551.79 cw(c5502.27,4529.59) 5533.19,4524.18 ; 5524.47,4551.79 cw(c5502.27,4529.59) 5533.19,4524.18 ; 5524.47,4551.79 cw(c5502.27,4529.59) 5533.19,4524.18 ; 5524.47,4551.79 cw(c5502.27,4529.59) 5533.19,4524.18 ; 5524.47,4551.79 cw(c5502.27,4529.59) 5533.19,4524.18 ; 5524.47,4551.79 cw(c5502.27,4529.59) 5533.19,4524.18 ; 5524.47,4551.79 cw(c5502.27,4529.59) 5533.19,4524.18 ; 5524.47,4551.79 cw(c5502.27,4529.59) 5533.19,4524.18 ; 5524.47,4551.79 cw(c5502.27,4529.59) 5533.19,4524.18 ; 5524.47,4551.79 cw(c5502.27,4529.59) 5533.19,4524.18 ; 5524.47,4551.79 cw(c5502.27,4529.59) 5533.19,4524.18 ; 5524.47,4551.79 cw(c5502.27,4529.59) 5533.19,4524.18 ; 5524.47,4551.79 cw(c5502.27,4529.59) 5533.19,4524.18 ; 5524.47,4551.79 cw(c5502.27,4529.59) 5533.19,4524.18 ; 5524.47,4551.79 cw(c5502.27,4529.59) 5533.19,4524.18 ; 5524.47,4551.79 cw(c5502.27,4529.59) 5533.19,4524.18 ; 5524.47,4551.79 cw(c5502.27,4529.59) 5533.19,4524.18 ; 5524.47,4551.79 cw(c5502.27,4529.59) 5533.19,4524.18 ; 5524.47,4551.79 cw(c5502.27,4529.59) 5533.19,4524.18 ; 5524.47,4551.79 cw(c5502.27,4529.59) 5533.19,4524.18 ; 5524.47,4551.79 cw(c5502.27,4529.59) 5533.19,4524.18 ; 5524.47,4551.79 cw(c5502.27,4529.59) 5533.19,4524.18 ; 5524.47,4551.79 cw(c5502.27,4529.59) 5533.19,4524.18 ; 5524.47,4551.79 cw(c5502.27,4529.59) 5533.19,4524.18 ; 5524.47,4551.79 cw(c5502.27,4529.59) 5533.19,4524.18 ; 5524.47,4551.79 cw(c5502.27,4529.59) 5533.19,4524.18 ; 5524.47,4551.79 cw(c5502.27,4529.59) 5533.19,4524.18 ; 5524.47,4551.79 cw(c5502.27,4529.59) 5533.19,4524.18 ; 5524.47,4551.79 cw(c5502.27,4529.59) 5533.19,4524.18 ; 5524.47,4551.79 cw(c5502.27,4529.59) 5533.19,4524.18 ; 5524.47,4551.79 cw(c5502.27,4529.59) 5533.19,4524.18 ; 5524.47,4551.79 cw(c5502.27,4529.59) 5533.19,4524.18 ; 5524.47,4551.79 cw(c5502.27,4529.59) 5533.19,4524.18 ; 5524.47,4551.79 cw(c5502.27,4529.59) 5533.19,4524.18 ; 5524.47,4551.79 cw(c5502.27,4529.59) 5533.19,4524.18 ; 5524.47,4551.79 cw(c5502.27,4529.59) 5533.19,4524.18 ; 5524.47,4551.79 cw(c5502.27,4529.59) 5533.19,4524.18 ; 5524.47,4551.79 cw(c5502.27,4529.59) 5533.19,4524.18 ; 5524.47,4551.79 cw(c5502.27,4529.59) 5533.19,4524.18 ; 5524.47,4551.79 cw(c5502.27,4529.59) 5533.19,4524.18 ; 5524.47,4551.79 cw(c5502.27,4529.59) 5533.19,4524.18 ; 5524.47,4551.79 cw(c5502.27,4529.59) 5533.19,4524.18 ; 5524.47,4551.79 cw(c5502.27,4529.59) 5533.19,4524.18 ; 5524.47,4551.79 cw(c5502.27,4529.59) 5533.19,4524.18 ; 5524.47,4551.79 cw(c5502.27,4529.59) 5533.19,4524.18 ; 5524.47,4551.79 cw(c5502.27,4529.59) 5533.19,4524.18 ; 5524.47,4551.79 cw(c5502.27,4529.59) 5533.19,4524.18 ; 5524.47,4551.79 cw(c5502.27,4529.59) 5533.19,4524.18 ; 5524.47,4551.79 cw(c5502.27,4529.59) 5533.19,4524.18 ; 5524.47,4551.79 cw(c5502.27,4529.59) 5533.19,4524.18 ; 5524.47,4551.79 cw(c5502.27,4529.59) 5533.19,4524.18 ; 5524.47,4551.79 cw(c5502.27,4529.59) 5533.19,4524.18 ; 5524.47,4551.79 cw(c5502.27,4529.59) 5533.19,4524.18 ; 5524.47,4551.79 cw(c5502.27,4529.59) 5533.19,4524.18 ; 5524.47,4551.79 cw(c5502.27,4529.59) 5533.19,4524.18 ; 5524.47,4551.79 cw(c5502.27,4529.59) 5533.19,4524.18 ; 5524.47,4551.79 cw(c5502.27,4529.59) 5533.19,4524.18 ; 5524.47,4551.79 cw(c5502.27,4529.59) 5533.19,4524.18 ; 5524.47,4551.79 cw(c5502.27,4529.59) 5533.19,4524.18 ; 5524.47,4551.79 cw(c5502.27,4529.59) 5533.19,4524.18 ; 5524.47,4551.79 cw(c5502.27,4529.59) 5533.19,4524.18 ; 5524.47,4551.79 cw(c5502.27,4529.59) 5533.19,4524.18 ; 5524.47,4551.79 cw(c5502.27,4529.59) 5533.19,4524.18 ; 5524.47,4551.79 cw(c5502.27,4529.59) 5533.19,4524.18 ; 5524.47,4551.79 cw(c5502.27,4529.59) 5533.19,4524.18 ; 5524.47,4551.79 cw(c5502.27,4529.59) 5533.19,4524.18 ; 5524.47,4551.79 cw(c5502.27,4529.59) 5533.19,4524.18 ; 5524.47,4551.79 cw(c5502.27,4529.59) 5533.19,4524.18 ; 5524.47,4551.79 cw(c5502.27,4529.59) 5533.19,4524.18 ; 5524.47,4551.79 cw(c5502.27,4529.59) 5533.19,4524.18 ; 5524.47,4551.79 cw(c5502.27,4529.59) 5533.19,4524.18 ; 5524.47,4551.79 cw(c5502.27,4529.59) 5533.19,4524.18 ; 5524.47,4551.79 cw(c5502.27,4529.59) 5533.19,4524.18 ; 5524.47,4551.79 cw(c5502.27,4529.59) 5533.19,4524.18 ; 5524.47,4551.79 cw(c5502.27,4529.59) 5533.19,4524.18 ; 5524.47,4551.79 cw(c5502.27,4529.59) 5533.19,4524.18 ; 5524.47,4551.79 cw(c5502.27,4529.59) 5533.19,4524.18 ; 5524.47,4551.79 cw(c5502.27,4529.59) 5533.19,4524.18 ; 5524.47,4551.79 cw(c5502.27,4529.59) 5533.19,4524.18 ; 5524.47,4551.79 cw(c5502.27,4529.59) 5533.19,4524.18 ; 5524.47,4551.79 cw(c5502.27,4529.59) 5533.19,4524.18 ; 5524.47,4551.79 cw(c5502.27,4529.59) 5533.19,4524.18 ; 5524.47,4551.79 cw(c5502.27,4529.59) 5533.19,4524.18 ; 5524.47,4551.79 cw(c5502.27,4529.59) 5533.19,4524.18 ; 5524.47,4551.79 cw(c5502.27,4529.59) 5533.19,4524.18 ; 5524.47,4551.79 cw(c5502.27,4529.59) 5533.19,4524.18 ; 5524.47,4551.79 cw(c5502.27,4529.59) 5533.19,4524.18 ; 5524.47,4551.79 cw(c5502.27,4529.59) 5533.19,4524.18 ; 5524.47,4551.79 cw(c5502.27,4529.59) 5533.19,4524.18 ; 5524.47,4551.79 cw(c5502.27,4529.59) 5533.19,4524.18 ; 5524.47,4551.79 cw(c5502.27,4529.59) 5533.19,4524.18 ; 5524.47,4551.79 cw(c5502.27,4529.59) 5533.19,4524.18 ; 5524.47,4551.79 cw(c5502.27,4529.59) 5533.19,4524.18 ; 5524.47,4551.79 cw(c5502.27,4529.59) 5533.19,4524.18 ; 5524.47,4551.79 cw(c5502.27,4529.59) 5533.19,4524.18 ; 5524.47,4551.79 cw(c5502.27,4529.59) 5533.19,4524.18 ; 5524.47,4551.79 cw(c5502.27,4529.59) 5533.19,4524.18 ; 5524.47,4551.79 cw(c5502.27,4529.59) 5533.19,4524.18 ; 5524.47,4551.79 cw(c5502.27,4529.59) 5533.19,4524.18 ; 5524.47,4551.79 cw(c5502.27,4529.59) 5533.19,4524.18 ; 5524.47,4551.79 cw(c5502.27,4529.59) 5533.19,4524.18 ; 5524.47,4551.79 cw(c5502.27,4529.59) 5533.19,4524.18 ; 5524.47,4551.79 cw(c5502.27,4529.59) 5533.19,4524.18 ; 5524.47,4551.79 cw(c5502.27,4529.59) 5533.19,4524.18 ; 5524.47,4551.79 cw(c5502.27,4529.59) 5533.19,4524.18 ; 5524.47,4551.79 cw(c5502.27,4529.59) 5533.19,4524.18 ; 5524.47,4551.79 cw(c5502.27,4529.59) 5533.19,4524.18 ; 5524.47,4551.79 cw(c5502.27,4529.59) 5533.19,4524.18 ; 5524.47,4551.79 cw(c5502.27,4529.59) 5533.19,4524.18 ; 5524.47,4551.79 cw(c5502.27,4529.59) 5533.19,4524.18 ; 5524.47,4551.79 cw(c5502.27,4529.59) 5533.19,4524.18 ; 5524.47,4551.79 cw(c5502.27,4529.59) 5533.19,4524.18 ; 5524.47,4551.79 cw(c5502.27,4529.59) 5533.19,4524.18 ; 5524.47,4551.79 cw(c5502.27,4529.59) 5533.19,4524.18 ; 5524.47,4551.79 cw(c5502.27,4529.59) 5533.19,4524.18 ; 5524.47,4551.79 cw(c5502.27,4529.59) 5533.19,4524.18 ; 5524.47,4551.79 cw(c5502.27,4529.59) 5533.19,4524.18 ; 5524.47,4551.79 cw(c5502.27,4529.59) 5533.19,4524.18 ; 5524.47,4551.79 cw(c5502.27,4529.59) 5533.19,4524.18 ; 5524.47,4551.79 cw(c5502.27,4529.59) 5533.19,4524.18 ; 5524.47,4551.79 cw(c5502.27,4529.59) 5533.19,4524.18 ; 5524.47,4551.79 cw(c5502.27,4529.59) 5533.19,4524.18 ; 5524.47,4551.79 cw(c5502.27,4529.59) 5533.19,4524.18 ; 5524.47,4551.79 cw(c5502.27,4529.59) 5533.19,4524.18 ; 5524.47,4551.79 cw(c5502.27,4529.59) 5533.19,4524.18 ; 5524.47,4551.79 cw(c5502.27,4529.59) 5533.19,4524.18 ; 5524.47,4551.79 cw(c5502.27,4529.59) 5533.19,4524.18 ; 5524.47,4551.79 cw(c5502.27,4529.59) 5533.19,4524.18 ; 5524.47,4551.79 cw(c5502.27,4529.59) 5533.19,4524.18 ; 5524.47,4551.79 cw(c5502.27,4529.59) 5533.19,4524.18 ; 5524.47,4551.79 cw(c5502.27,4529.59) 5533.19,4524.18